# Altium PCB 175-00024_rev3, Backplane, Instrument Crate.PcbDoc (part 2 of 4)
Units mil, origin at the board's own origin, x right, y up, seen from the top; angles counter-clockwise.
Board outline 8400 x 10183.07 mil, 8 copper layers (Top Layer (*.GTL), Mid-Layer 1 (*.G1), +3.3V (*.GP1), +24V (*.GP2), RTN (*.GP3), +12V (*.GP4), Signal GND (*.GP5), Bottom Layer (*.GBL)); 240 components, 169 nets, 1580 pads, 490 vias.
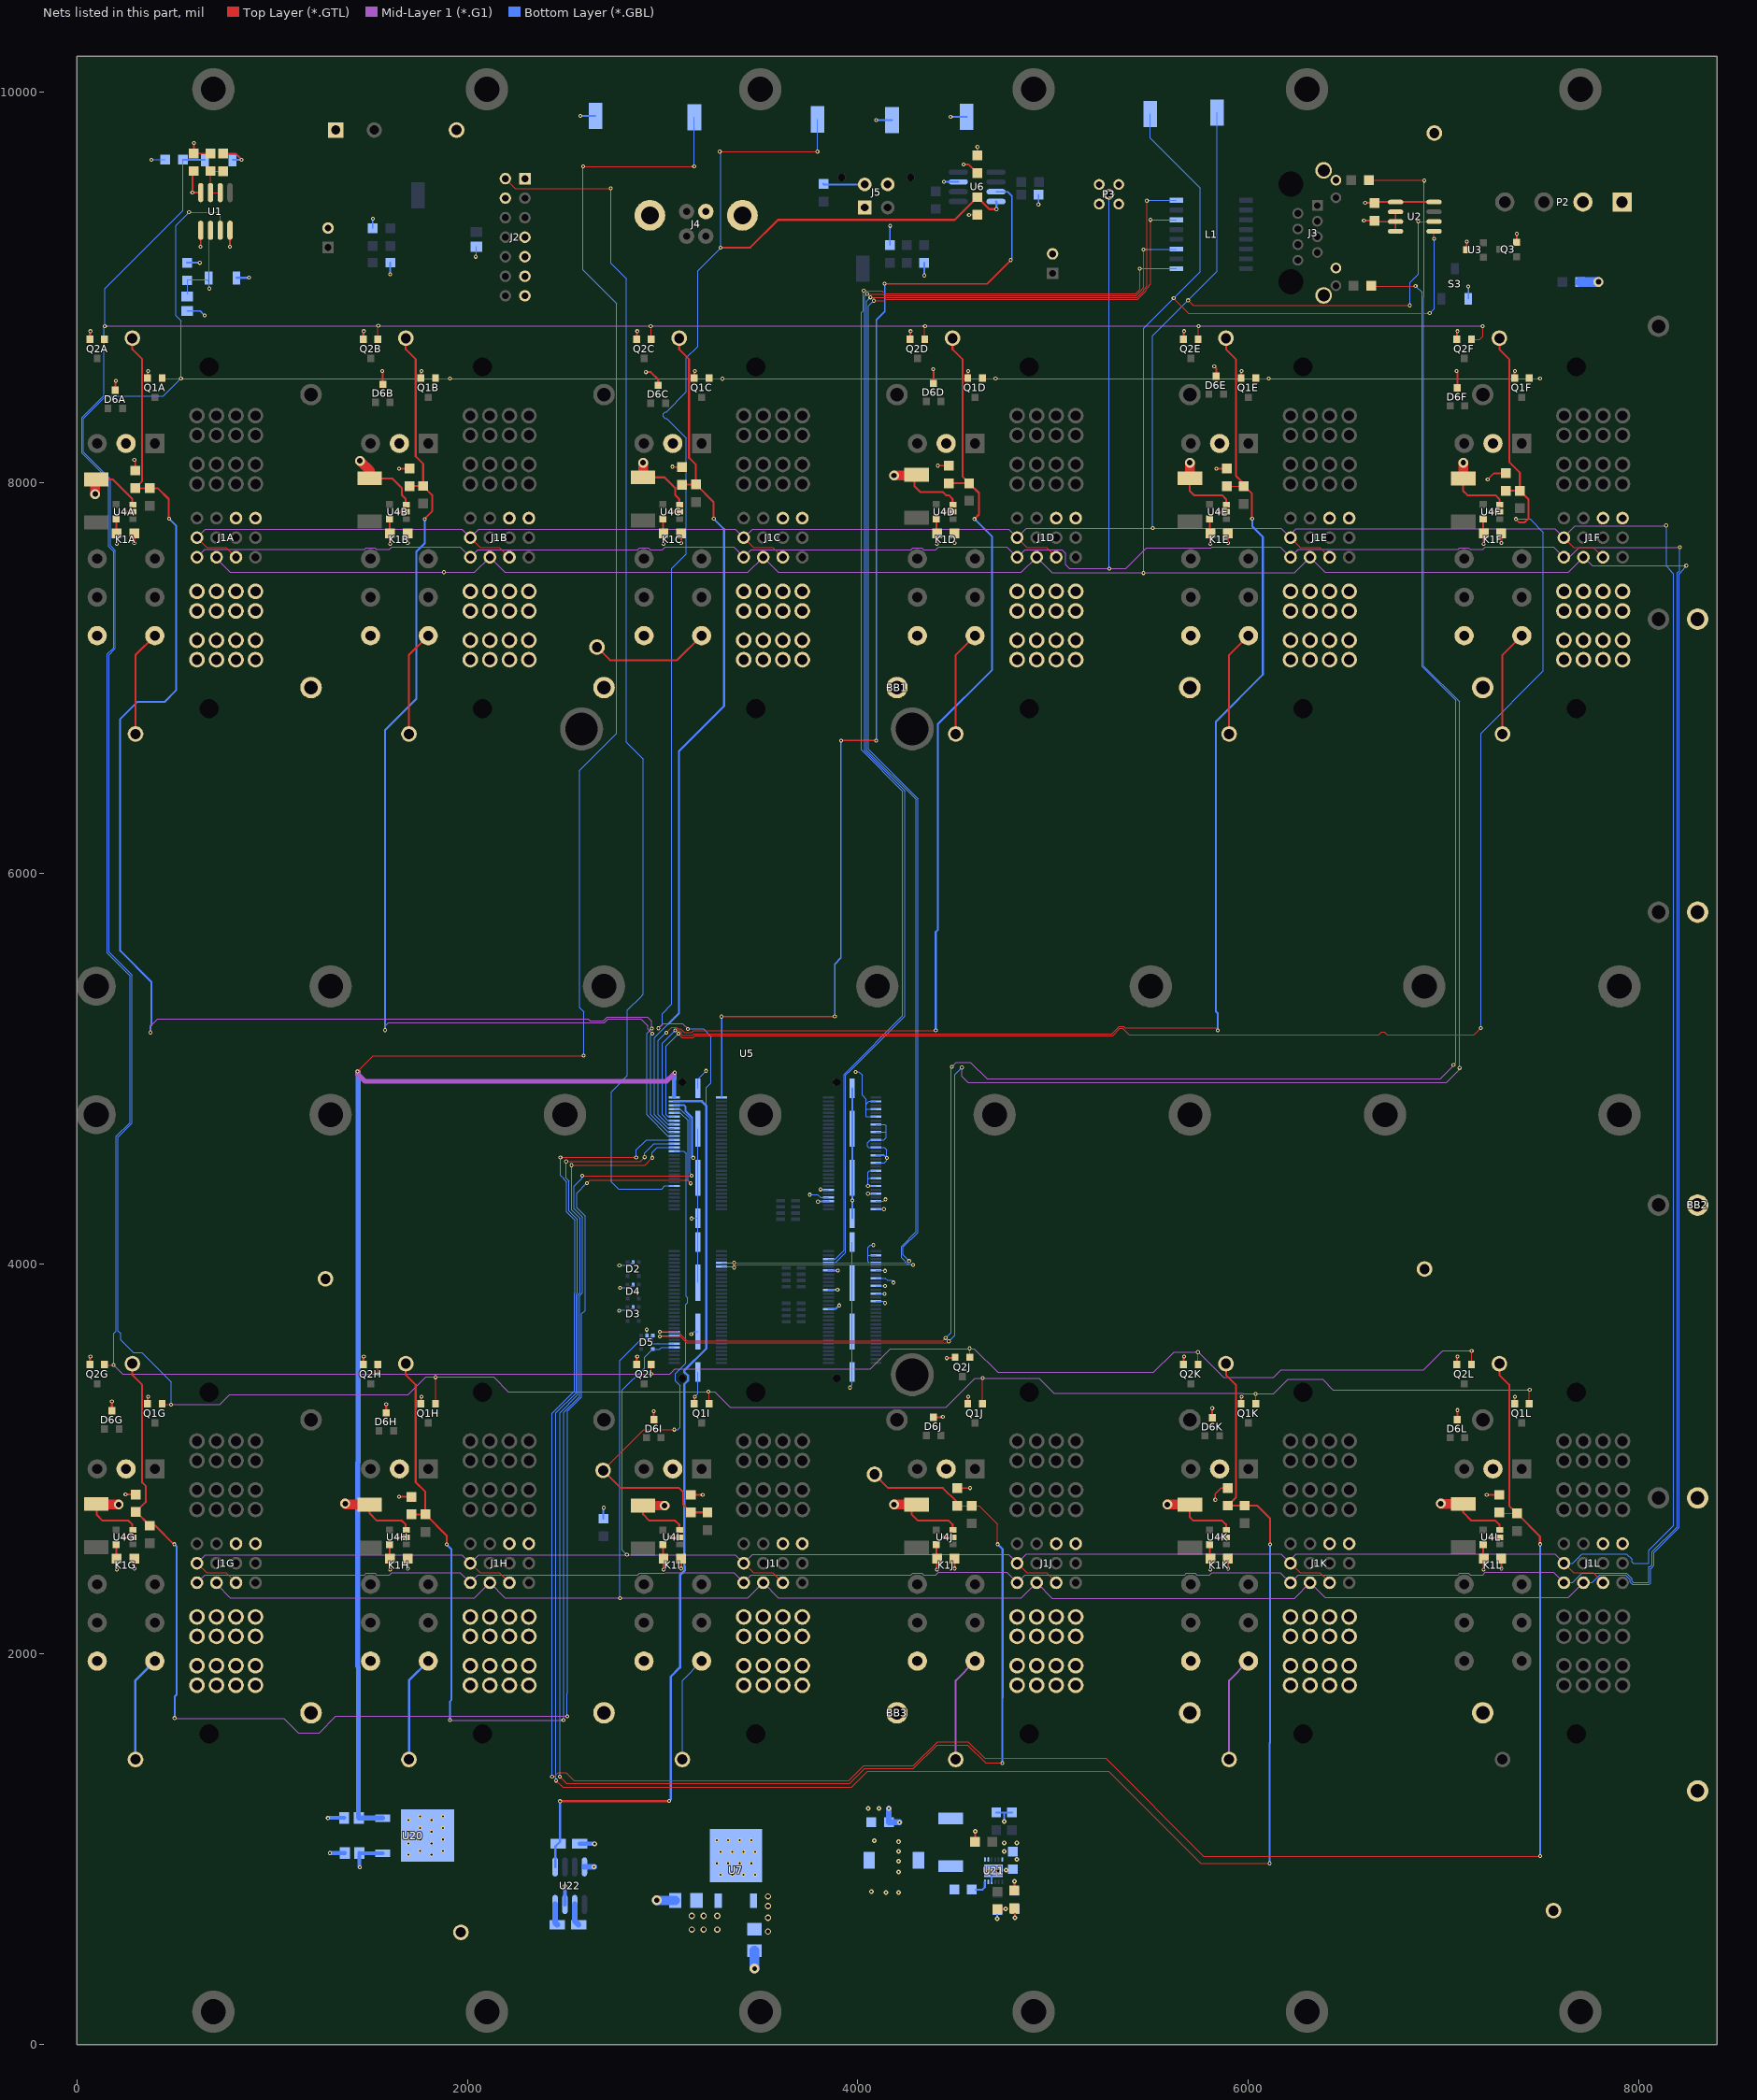
[diagram p8: the nets of this part, all layers, seen from the top]

## Via types
v1: diameter 20, hole 10, Top Layer (*.GTL) to Bottom Layer (*.GBL), 422 vias
v2: diameter 24, hole 10, Top Layer (*.GTL) to Bottom Layer (*.GBL), 28 vias
v3: diameter 50, hole 28, Top Layer (*.GTL) to Bottom Layer (*.GBL), 26 vias
v4: diameter 32, hole 20, Top Layer (*.GTL) to Bottom Layer (*.GBL), 10 vias
v5: diameter 25.98, hole 12.99, Top Layer (*.GTL) to Bottom Layer (*.GBL), tented top, 2 vias
v6: diameter 50, hole 25, Top Layer (*.GTL) to Bottom Layer (*.GBL), 2 vias

## Nets (pads, with @x,y where several pads share a name; then routed paths per layer and width w, separated by ;. In a path a pad name is that pad's centre, name@x,y a point inside that pad or via, vN(x,y) a via of type N, cw(c..) or ccw(c..) an arc to the next point about the centre after c; other vN are vias at no path point)
+3.3V: C6.2 C7.2 C13.2 J1A.11 J1B.11 J1C.11 J1D.11 J1E.11 J1F.11 J1G.11 J1H.11 J1I.11 J1J.11 J1K.11 J1L.11 L2.2 Q3.2 R2.2 R5.2 R12.1 R13.2 R32.2 S2.1 TP27.1 U1.4 U1.8 U2.1 U2.8 U5.B121 U21.5 | length 1750.6
  Top Layer (*.GTL) w10: C6.2@600,9595 592,9587 v1(592,9485) 592.54,9484.46 U1.8@635,9484.46 ; R12.1@750,9684 813.08,9684 v1(844,9653.08) ; v1(785,9207) U1.4@785,9291.54 ; v1(6598,9432) 6647,9432 6651,9436 U2.1@6753.57,9436 U2.8@6950.43,9436 ; Q3.2@7374,9230 v1(7374,9273)
  Bottom Layer (*.GBL) w5: v1(2043,9156.08) 2046,9159.08 R5.2@2046,9207.68
  Bottom Layer (*.GBL) w10: R2.2@565,9125 v1(630,9125) ; S2.1@798,9652 842.92,9652 v1(844,9653.08) ; v1(2579,9877.08) TP27.1@2656,9877.08 ; R13.2@2697,2694 2697,2749 v1(2698,2750) ; U5.B121@3970.93,4232.52 v1@3970.93,4324.01 ; U5.B121@3970.93,4897.48 U5.B121@3970.93,4690 U5.B121@3970.93,4440 3970.93,4324.15 v1(3971,4324.08) ; v2(4713.8,646.34) R32.2@4713.8,689.34
  other v2: 4143.8,779.34 4208.8,779.34 4068.8,784.34 4208.8,884.34 4208.8,939.34 4208.8,989.34 4208.8,1039.34 4083.8,1044.34 4053.8,1209.34 4108.8,1209.34
+5V: C12.1 TP17.1 U5.A1 U20.3 | length 12457.4
  Top Layer (*.GTL) w5: v1(1438,4984.08) 1519,5065.08 v1(2596,5065.08) ; v1(2593,9618.08) v1(3162,9618.08)
  Mid-Layer 1 (*.G1) w25: v1(1438,4984.08) 1438,4971.08 1476,4933.08 3020,4933.08 v1@3059,4972.08
  Bottom Layer (*.GBL) w5: v1(2593,9618.08) 2593,9089.08 2765,8917.08 2765,6715.08 2575,6525.08 2575,5311.08 2596,5290.08 v1(2596,5065.08) ; v1(3162,9618.08) 3162,9869.08 TP17.1@3163,9870.08
  Bottom Layer (*.GBL) w20: U5.A1@3059.12,4853.25 3059.12,4945.48
  Bottom Layer (*.GBL) w25: v1@1441,4984.08 1441,2981.64 1439,2979.64 1439,1937.35 1442.6,1933.75 1442.6,1163.8 C12.1@1444.4,1162 1445.64,1160.76 U20.3@1566.74,1160.76 ; v1@3059,4972.08 3059,4945.6 3059.12,4945.48
  other v1: 3062,4978.08
+12V: C2A.2 C2B.2 C2C.2 C2D.2 C2E.2 C2F.2 C2G.2 C2H.2 C2I.2 C2J.2 C2K.2 C2L.2 C8.1 C10.1 C19.2 R8.2 R10.2 TP29.1 U4A.5 U4B.5 U4C.5 U4D.5 U4E.5 U4F.5 U4G.5 U4H.5 U4I.5 U4J.5 U4K.5 U4L.5 U5.A5 U6.7 U7.3 U20.1 U22.8 | length 2503
  Top Layer (*.GTL) w10: U4G.5@201.99,2561.82 201.99,2491.82 C2G.2@204.99,2488.82 v1(204.99,2433.82) ; U4A.5@202,7813 202,7743 C2A.2@205,7740 v1(205,7685) ; U4H.5@1601.99,2561.82 1601.99,2491.82 C2H.2@1604.99,2488.82 v1(1604.99,2433.82) ; U4B.5@1602,7813 1602,7743 C2B.2@1605,7740 v1(1605,7685) ; U4I.5@3001.99,2561.82 3001.99,2491.82 C2I.2@3004.99,2488.82 v1(3004.99,2433.82) ; U4C.5@3002,7813 3002,7743 C2C.2@3005,7740 v1(3005,7685) ; U4J.5@4401.99,2561.82 4401.99,2491.82 C2J.2@4404.99,2488.82 v1(4404.99,2433.82) ; U4D.5@4402,7813 4402,7743 C2D.2@4405,7740 v1(4405,7685) ; v1(4541,9629) 4567,9629 C8.1@4611,9585 ; U4K.5@5801.99,2561.82 5801.99,2491.82 C2K.2@5804.99,2488.82 v1(5804.99,2433.82) ; U4E.5@5802,7813 5802,7743 C2E.2@5805,7740 v1(5805,7685) ; U4L.5@7201.99,2561.82 7201.99,2491.82 C2L.2@7204.99,2488.82 v1(7204.99,2433.82) ; U4F.5@7202,7813 7202,7743 C2F.2@7205,7740 v1(7205,7685)
  Bottom Layer (*.GBL) w10: v1(1605,9066) 1606,9067 R10.2@1606,9126 ; U5.A5@3059.12,4811.06 3111.02,4811.06 3118,4804.08 3118,4780.64 3151.5,4747.14 3151.5,4547.58 v1(3157,4542.08) ; v1(4093,9855.08) TP29.1@4175,9855.08 ; v1(4340,9060.08) R8.2@4340,9125.08 ; v1(4441,9540) 4442,9539 U6.7@4514.54,9539
  Bottom Layer (*.GBL) w20: v1(1449,909) 1447.4,910.6 C10.1@1447.4,982 1448.17,981.24 U20.1@1566.74,981.24
  Bottom Layer (*.GBL) w30: U22.8@2600,911.06 2648.46,911.06 v2(2649,911.6)
  other v4: 3150,590 3210,590 3280,590 3150,660 3210,660 3280,660
+24V: BB1.1 BB2.1 BB3.1 C15.2 C18.2 C22.1 D6A.3 D6B.3 D6C.3 D6D.3 D6E.3 D6F.3 D6G.3 D6H.3 D6I.3 D6J.3 D6K.3 D6L.3 J5.1 K1A.3 K1B.3 K1C.3 K1D.3 K1E.3 K1F.3 K1G.3 K1H.3 K1I.3 K1J.3 K1K.3 K1L.3 P2.1 P2.2 R4A.1 R4B.1 R4C.1 R4D.1 R4E.1 R4F.1 R4G.1 R4H.1 R4I.1 R4J.1 R4K.1 R4L.1 R29.1 TP9.1 U4A.3 U4B.3 U4C.3 U4D.3 U4E.3 U4F.3 U4G.3 U4H.3 U4I.3 U4J.3 U4K.3 U4L.3 U5.B55 U5.B71 U5.B81 U5.B91 U7.1 U21.12 | length 5773.2
  Top Layer (*.GTL) w10: R4G.1@99.99,2769.06 103.04,2766 103.04,2712.96 132.18,2683.82 264.99,2683.82 284.99,2663.82 284.99,2638.82 U4G.3@287.99,2635.82 ; R4A.1@100,8016.24 183.76,8016.24 285,7915 285,7890 U4A.3@288,7887 ; D6G.3@180,3246.26 v1(180,3295) ; D6A.3@197.4,8472.52 197.4,8517.4 v1(200,8520) ; R4H.1@1500,2766.24 1500,2721 1537.18,2683.82 1664.99,2683.82 1684.99,2663.82 1684.99,2638.82 U4H.3@1687.99,2635.82 ; R4B.1@1500,8021.24 1614.76,8021.24 1665,7971 1665,7935 1685,7915 1685,7890 U4B.3@1688,7887 ; v1(1565,8570) 1567.4,8567.6 D6B.3@1567.4,8502.52 ; D6H.3@1585,3236.26 v1(1585,3280) ; R4I.1@2900,2761.47 2900,2716 2932.18,2683.82 3064.99,2683.82 3084.99,2663.82 3084.99,2638.82 U4I.3@3087.99,2635.82 ; R4C.1@2900,8026.24 3009.76,8026.24 3065,7971 3065,7935 3085,7915 3085,7890 U4C.3@3088,7887 ; v1(2915,8565) 2940,8565 2977.4,8527.6 D6C.3@2977.4,8497.52 ; D6I.3@2955,3201.26 v1(2955,3245) ; R4J.1@4299.99,2766.24 4299.75,2766 4275,2741.25 4275,2716 4307.18,2683.82 4464.99,2683.82 4484.99,2663.82 4484.99,2638.82 U4J.3@4487.99,2635.82 ; R4D.1@4300,8040.24 4295.76,8036 4290,8030.24 4290,7981 4320,7951 4435,7951 4451,7935 4465,7935 4485,7915 4485,7890 U4D.3@4488,7887 ; v1(4385,8580) 4387.4,8577.6 D6D.3@4387.4,8507.52 ; D6J.3@4387.6,3212.52 4432.52,3212.52 v1(4435,3215) ; R29.1@4598.8,1039.34 4601.8,1042.34 v2(4601.8,1092.34) ; R4K.1@5700,2766.24 5700,2701 5717.18,2683.82 5864.99,2683.82 5884.99,2663.82 5884.99,2638.82 U4K.3@5887.99,2635.82 ; R4E.1@5700,8021.24 5700,7956 5721,7935 5865,7935 5885,7915 5885,7890 U4E.3@5888,7887 ; D6K.3@5815,3211.26 v1(5815,3260) ; v1(5825,8595) 5835,8585 D6E.3@5835,8545 ; v1(7065,8570) 7070,8565 D6F.3@7070,8485 ; D6L.3@7070,3201.26 v1(7070,3250) ; R4L.1@7099.99,2769.06 7099.99,2726.01 7142.18,2683.82 7264.99,2683.82 7284.99,2663.82 7284.99,2638.82 U4L.3@7287.99,2635.82 ; R4F.1@7100,8020.24 7100,7956 7121,7935 7265,7935 7285,7915 7285,7890 U4F.3@7288,7887
  Top Layer (*.GTL) w50: v3(95,7941) 95,8011.24 R4A.1@100,8016.24 ; R4G.1@103.04,2766 v3(215,2766) ; v3(1375,2771) 1379.76,2766.24 R4H.1@1500,2766.24 ; v3(1450,8111) 1500,8061 R4B.1@1500,8021.24 ; R4I.1@2900,2761.47 2900.47,2761 v3(3010,2761) ; R4C.1@2900,8026.24 v3(2900,8101) ; v3(4185,2766) R4J.1@4299.75,2766 ; v3(4185,8036) R4D.1@4295.76,8036 ; v3(5585,2766) 5699.76,2766 R4K.1@5700,2766.24 ; R4E.1@5700,8021.24 v3(5700,8101) ; v3(6985,2771) 6986.94,2769.06 R4L.1@7099.99,2769.06 ; R4F.1@7100,8020.24 v3(7100,8101)
  Bottom Layer (*.GBL) w10: v1(3795.89,4317.25) 3797.57,4318.94 U5.B55@3849.28,4318.94 ; U5.B91@3849.28,3767.76 3885.76,3767.76 v1(3904,3786) ; U5.B81@3849.28,3866.18 3893.9,3866.18 v1@3894,3866.08 ; U5.B71@3849.28,3964.61 3897.53,3964.61 v1(3898,3965.08) ; v1(4475,9872.08) TP9.1@4557,9872.08
  other v1: 3896,3866
  other v2: 4813.8,949.34 4748.8,989.34 4748.8,1034.34 4813.8,1034.34
  other v4: 3540,580 3540,650 3540,710 3540,760
-12V: C9.1 C16.2 TP28.1 U5.A3 U6.4 U22.5 | length 12395.7
  Top Layer (*.GTL) w5: v1(3293,9694.08) v1(3793,9694.08)
  Top Layer (*.GTL) w10: v1(3297,9203) 3449,9203 3591,9345 4496,9345 C9.1@4612,9461 4673,9400 v1(4710,9400)
  Top Layer (*.GTL) w12: v1(2475,1247.08) v1@3036,1247.08
  Mid-Layer 1 (*.G1) w5: v1(2978,5205.08) 3003,5230.08 3102,5230.08 v1(3130,5202.08)
  Bottom Layer (*.GBL) w5: v1(2978,5205.08) 2998,5225.08 2998,5280.08 3047,5329.08 3047,7560.08 3122,7635.08 3122,8226.74 3020.24,8328.5 3013.17,8328.5 3003.5,8338.17 3003.5,8351.83 3013.17,8361.5 3020.24,8361.5 3122,8463.26 3122,8639.08 3180,8697.08 3180,9083.08 3299,9202.08 3299,9688.08 v1(3293,9694.08) ; v1(3130,5202.08) 3209.08,5202.08 3248,5163.16 3248,4925.08 3225,4902.08 3225,4807.08 ; v1(3793,9694.08) 3794,9695.08 TP28.1@3794,9859.08
  Bottom Layer (*.GBL) w10: U6.4@4707.46,9439 4710,9436.46 v1(4710,9400)
  Bottom Layer (*.GBL) w12: U22.5@2450,911.06 2450,1014.6 C16.2@2465,1029.6 2475,1039.6 v1(2475,1247.08) ; v1(3033,1249.08) 3041,1257.08 3041,1884.08 3089,1932.08 3089,2404.55 3114.99,2430.53 3114.99,2447.1 3111,2451.09 3111,2923.73 3111.56,2924.29 3111.56,2973.35 3111,2973.91 3111,3381.82 3130.54,3401.36 3130.54,3426.28 3111,3445.82 3111,3452.08 3225,3566.08 3225,4807.08 3201.33,4830.75 U5.A3@3059.12,4830.75
EMU: J2.2 U5.A47 | length 6127.2
  Top Layer (*.GTL) w5: J2.2@2195,9556.08 2246,9505.08 2733,9505.08 v1(2734,9506.08)
  Bottom Layer (*.GBL) w5: v1@2735,9506.08 2735,9121.5 2814,9042.5 2814,6669.99 2890.14,6593.85 2892.77,6591.22 2895.41,6588.58 2898.04,6585.95 2900.68,6583.31 2900.68,5379.49 2898.04,5376.85 2895.41,5374.22 2892.77,5371.58 2890.14,5368.94 2820,5298.81 2820,4962.81 2738,4880.81 2738,4418.35 2774.7,4381.65 2995.97,4381.65 3012,4397.68 U5.A47@3059.12,4397.68
ETHERLED_ACT: R7.1 U5.A103 | length 9913.1
  Top Layer (*.GTL) w5: v1(2986,3651.8) 3079,3651.8 3126.73,3604.08 4434,3604.08 v1(4449,3619.08) ; R7.1@6631,9006.08 v1(6856,9006.08)
  Mid-Layer 1 (*.G1) w5: v1(4481,5007.08) 4505,5031.08 4577,5031.08 4661.2,4946.88 6983,4946.88 7050,5013.88 v1(7050,5018.08)
  Bottom Layer (*.GBL) w5: v1(2986,3651.8) 2988.16,3649.65 U5.A103@3059.12,3649.65 ; v1(4449,3619.08) 4477,3647.08 4477,5003.08 v1(4481,5007.08) ; v1(6856,9006.08) 6889,8973.08 6889,7056.08 7061.2,6883.88 7061.2,5030.28 v1@7049,5018.08
ETHERLED_FD: R6.1 U5.A105 | length 10547.7
  Top Layer (*.GTL) w5: v1(2986,3627.8) 3090.28,3627.8 3123,3595.08 4458.94,3595.08 v1(4465.97,3602.11) ; R6.1@6616,9548.08 6898,9548.08 v1(6900,9546.08)
  Mid-Layer 1 (*.G1) w5: v1(4533,5004.08) 4533,4959.08 4565,4927.08 7014,4927.08 7081,4994.08 v1(7081,5002.08)
  Bottom Layer (*.GBL) w5: v1(2986,3627.8) 2988.16,3629.96 U5.A105@3059.12,3629.96 ; v1(4465.97,3602.11) 4496.8,3632.94 4496.8,4967.88 v1(4533,5004.08) ; v1(6900,9546.08) 6900,8952.08 6898,8950.08 6898,7059.81 7081,6876.81 v1(7081,5002.08)
ETHERRX+: L1.11 U5.B67 | length 7037.7
  Top Layer (*.GTL) w5: v1(4047.09,8964.99) 4128.54,8964.99 4136.51,8957.02 5425.73,8957.02 5454,8985.29 5454,8989.02 5463,8998.02 v1(5463,9193.08)
  Bottom Layer (*.GBL) w5: U5.B67@3849.28,4003.98 3885,4003.98 3938,4056.98 3938,4965.33 3952.17,4979.5 3953.42,4979.5 4241,5267.08 4241,6421.08 4036,6626.08 4036,8953.9 v1(4047.09,8964.99) ; v1(5463,9193.08) 5465,9195.08 L1.11@5632,9195.08
ETHERRX-: L1.9 U5.B65 | length 6955.1
  Top Layer (*.GTL) w5: v1(4030.12,8981.96) 4124.3,8981.96 4140.24,8966.02 5422,8966.02 5445,8989.02 v1@5445,9095.08
  Bottom Layer (*.GBL) w5: U5.B65@3849.28,4023.66 3885,4023.66 3929,4067.66 3929,4969.06 3948.44,4988.5 3949.69,4988.5 4230,5268.81 4230,6419.35 4019,6630.35 4019,8871.08 4027,8879.08 4027,8978.84 v1(4030.12,8981.96) ; v1(5444,9094.08) 5445,9095.08 L1.9@5632,9095.08
ETHERTX+: L1.16 U5.A70 | length 8161.2
  Top Layer (*.GTL) w5: v1(3366,3979.98) 3381,3994.98 4280.5,3994.98 v1(4282,3993.48) ; v1(4064.06,8948.02) 5429.46,8948.02 5463,8981.56 5463,8985.29 5472,8994.29 5472,8998.02 5481,9007.02 v1@5481,9445.08
  Bottom Layer (*.GBL) w5: U5.A70@3302.43,3984.29 3361.69,3984.29 v1(3366,3979.98) ; v1(4064.06,8948.02) 4045,8928.96 4045,6629.81 4298,6376.81 4298,4163.53 4223,4088.53 4223,4029.15 4255.37,3996.78 4278.7,3996.78 v1(4282,3993.48) ; v1(5480,9443.08) 5482,9445.08 L1.16@5632,9445.08
ETHERTX-: L1.14 U5.A68 | length 7963.7
  Top Layer (*.GTL) w5: v1(3366,4003.98) 4252.9,4003.98 v1(4262.2,4013.28) ; v1(4081.03,8931.05) 4137.03,8931.05 4145,8939.02 5433.18,8939.02 5472,8977.84 5472,8981.56 5481,8990.56 5481,8994.29 5490,9003.29 5490,9007.02 5499,9016.02 v1@5499,9345.08
  Bottom Layer (*.GBL) w5: U5.A68@3302.43,4003.98 v1(3366,4003.98) ; v1(4081.03,8931.05) 4054,8904.02 4054,6633.53 4307,6380.53 4307,4159.81 4232,4084.81 4232,4043.48 v1(4262.2,4013.28) ; v1(5498,9345.08) L1.14@5632,9345.08
"FAN SPEED": U5.A2 U6.3 | length 6076.1
  Top Layer (*.GTL) w6: v1(3301,5265) 3881,5265 v1(3882,5266) ; v1(3914,6678) v1(4094,6678) ; v1(4137,9018) 4662,9018 v1(4783,9139)
  Bottom Layer (*.GBL) w6: v1(3301,5265) 3302.43,5263.57 U5.A2@3302.43,4850.43 ; v1(3882,5266) 3882,5534 3914,5566 v1(3914,6678) ; v1(4094,6678) 4094,8833 4137,8876 v1(4137,9018) ; U6.3@4707.46,9489 4767,9489 4788,9468 4788,9144 v1(4783,9139)
"FAN TACH": J5.3 R17.2 | length 212.1
  Bottom Layer (*.GBL) w10: R17.2@3824,9529 3826.89,9526.11 J5.3@4034.89,9526.11
GND: C1.1 C2A.1 C2B.1 C2C.1 C2D.1 C2E.1 C2F.1 C2G.1 C2H.1 C2I.1 C2J.1 C2K.1 C2L.1 C3.1 C4.1 C5.2 C6.1 C7.1 C8.2 C9.2 C10.2 C12.2 C13.1 C14.1 C15.1 C16.1 C18.1 C19.1 C21A.2 C21B.2 C21C.2 C21D.2 C21E.2 C21F.2 C21G.2 C21H.2 C21I.2 C21J.2 C21K.2 C21L.2 D2.2 D3.2 D4.2 D5.2 J1A.12 J1B.12 J1C.12 J1D.12 J1E.12 J1F.12 J1G.12 J1H.12 J1I.12 J1J.12 J1K.12 J1L.12 J2.1 J2.4 J2.7 J2.9 J2.11 J2.13 J3.9 J3.11 J3.13 J3.14 J4.4 J4.5 J4.6 J5.4 P1.2 P3.2 P3.3 P3.4 P3.5 P4.2 Q1A.2 Q1B.2 Q1C.2 Q1D.2 Q1E.2 Q1F.2 Q1G.2 Q1H.2 Q1I.2 Q1J.2 Q1K.2 Q1L.2 Q2A.2 Q2B.2 Q2C.2 Q2D.2 Q2E.2 Q2F.2 Q2G.2 Q2H.2 Q2I.2 Q2J.2 Q2K.2 Q2L.2 R1.2 R3.1 R15.1 R30.1 R31.1 R34.1 S1.1 S3.1 TP1.1 TP2.1 TP3.1 TP6.1 TP7.1 TP8.1 U1.1 U2.2 U2.3 U2.4 U3.3 U4A.2 U4B.2 U4C.2 U4D.2 U4E.2 U4F.2 U4G.2 U4H.2 U4I.2 U4J.2 U4K.2 U4L.2 U5.A121 U5.A122 U5.B4 U5.B8 U5.B12 U5.B16 U5.B20 U5.B24 U5.B28 U5.B32 U5.B36 U5.B40 U5.B44 U5.B48 U5.B49 U5.B52 U5.B53 U5.B56 U5.B60 U5.B64 U5.B68 U5.B72 U5.B76 U5.B80 U5.B84 U5.B88 U5.B122 U7.2 U20.2 U21.4 U21.13 U22.3 | length 9159
  Top Layer (*.GTL) w8: v1(250,2818) C21G.2@302,2818 ; v1(295,8116) 300,8111 C21A.2@300,8061 ; v1(600,9739) C6.1@600,9685 C5.2@685,9685 ; v1(634,9207) 635,9208 U1.1@635,9291.54 ; v1(1650,2806) C21H.2@1715,2806 ; v1(1650,8071) C21B.2@1705,8071 ; v1(3050,8081) 3052,8079 C21C.2@3100,8079 ; C21I.2@3145,2816 v1(3205,2816) ; v1(4410,8086) C21D.2@4465,8086 ; C21J.2@4509,2850 4574,2850 v1(4575,2851) ; v1(4569,9370) 4570,9371 C9.2@4612,9371 ; C8.2@4611,9675 4611,9717 v1(4612,9718) ; v1(5830,2791) 5830,2821 5860,2851 C21K.2@5895,2851 ; v1(5835,8071) C21E.2@5890,8071 ; v1(6591,9342) 6592,9341 C7.1@6646,9341 6651,9336 U2.3@6753.57,9336 ; U2.4@6753.57,9286 U2.3@6753.57,9336 ; U2.2@6753.57,9386 U2.3@6753.57,9336 ; U3.3@7118,9191 7118,9233 v1(7119,9234) ; v1(7220,2816) C21L.2@7285,2816 ; v1(7225,8016) 7256,8047 C21F.2@7318,8047
  Top Layer (*.GTL) w10: Q2G.2@67.59,3480.08 Q2G.2@67.59,3483.03 v1@67.59,3521.42 ; Q2A.2@67.6,8731.26 Q2A.2@67.6,8734.21 v1@67.6,8772.6 ; v1(239.99,2598.82) U4G.2@287.99,2598.82 ; v1(240,7850) U4A.2@288,7850 ; v1(294.99,2438.82) C2G.1@294.99,2488.82 ; v1(295,7690) C2A.1@295,7740 ; Q1G.2@362.59,3280.08 Q1G.2@362.59,3283.03 362.59,3316.42 v1(364.99,3318.82) ; Q1A.2@362.6,8531.26 Q1A.2@362.6,8534.21 362.6,8567.6 v1(365,8570) ; Q2H.2@1467.59,3480.08 Q2H.2@1467.59,3483.03 v1@1467.59,3521.42 ; Q2B.2@1467.6,8731.26 Q2B.2@1467.6,8734.21 v1@1467.6,8772.6 ; v1(1639.99,2598.82) U4H.2@1687.99,2598.82 ; v1(1640,7850) U4B.2@1688,7850 ; v1(1694.99,2438.82) C2H.1@1694.99,2488.82 ; v1(1695,7690) C2B.1@1695,7740 ; Q1H.2@1762.59,3280.08 Q1H.2@1762.59,3283.03 1762.59,3316.42 v1(1764.99,3318.82) ; Q1B.2@1762.6,8531.26 Q1B.2@1762.6,8534.21 1762.6,8567.6 v1(1765,8570) ; Q2I.2@2867.59,3480.08 Q2I.2@2867.59,3483.03 v1@2867.59,3521.42 ; Q2C.2@2867.6,8731.26 Q2C.2@2867.6,8734.21 v1@2867.6,8772.6 ; v1(3039.99,2598.82) U4I.2@3087.99,2598.82 ; v1(3040,7850) U4C.2@3088,7850 ; v1(3094.99,2438.82) C2I.1@3094.99,2488.82 ; v1(3095,7690) C2C.1@3095,7740 ; Q1I.2@3162.59,3280.08 Q1I.2@3162.59,3283.03 3162.59,3316.42 v1(3164.99,3318.82) ; Q1C.2@3162.6,8531.26 Q1C.2@3162.6,8534.21 3162.6,8567.6 v1(3165,8570) ; Q2D.2@4267.6,8731.26 Q2D.2@4267.6,8734.21 v1@4267.6,8772.6 ; v1(4439.99,2598.82) U4J.2@4487.99,2598.82 ; v1(4440,7850) U4D.2@4488,7850 ; v1(4454.5,3516.14) 4455.76,3517.4 Q2J.2@4498.1,3517.4 ; v1(4494.99,2438.82) C2J.1@4494.99,2488.82 ; v1(4495,7690) C2D.1@4495,7740 ; Q1J.2@4562.59,3280.08 Q1J.2@4562.59,3283.03 4562.59,3316.42 v1(4564.99,3318.82) ; Q1D.2@4562.6,8531.26 Q1D.2@4562.6,8534.21 4562.6,8567.6 v1(4565,8570) ; R34.1@4713.8,694.34 4755.8,694.34 v2(4756.8,695.34) ; C14.1@4801.8,789.34 4801.8,835.34 v2(4802.8,836.34) ; Q2K.2@5667.59,3480.08 Q2K.2@5667.59,3483.03 v1@5667.59,3521.42 ; Q2E.2@5667.6,8731.26 Q2E.2@5667.6,8734.21 v1@5667.6,8772.6 ; v1(5839.99,2598.82) U4K.2@5887.99,2598.82 ; v1(5840,7850) U4E.2@5888,7850 ; v1(5894.99,2438.82) C2K.1@5894.99,2488.82 ; v1(5895,7690) C2E.1@5895,7740 ; Q1K.2@5962.59,3280.08 Q1K.2@5962.59,3283.03 5962.59,3316.42 v1(5964.99,3318.82) ; Q1E.2@5962.6,8531.26 Q1E.2@5962.6,8534.21 5962.6,8567.6 v1(5965,8570) ; Q2L.2@7067.59,3480.08 Q2L.2@7067.59,3483.03 v1@7067.59,3521.42 ; Q2F.2@7067.6,8731.26 Q2F.2@7067.6,8734.21 v1@7067.6,8772.6 ; v1(7239.99,2598.82) U4L.2@7287.99,2598.82 ; v1(7240,7850) U4F.2@7288,7850 ; v1(7294.99,2438.82) C2L.1@7294.99,2488.82 ; v1(7295,7690) C2F.1@7295,7740 ; Q1L.2@7362.59,3280.08 Q1L.2@7362.59,3283.03 7362.59,3316.42 v1(7364.99,3318.82) ; Q1F.2@7362.6,8531.26 Q1F.2@7362.6,8534.21 7362.6,8567.6 v1(7365,8570)
  Bottom Layer (*.GBL) w5: v1(383,9653.08) R3.1@453,9653.08 ; v1(2778,3758.6) 2780.66,3761.26 2832.53,3761.26 2848.88,3777.6 D3.2@2849.53,3777.6 D3.2@2849.53,3772.13 ; v1(2779,3990.6) 2779.66,3991.26 2832.53,3991.26 2848.88,4007.6 D2.2@2849.53,4007.6 D2.2@2849.53,4002.13 ; v1(2783,3875.6) 2783.66,3876.26 2832.53,3876.26 2848.88,3892.6 D4.2@2849.53,3892.6 D4.2@2849.53,3887.13 ; D5.2@2919.53,3632.6 v1(2919.53,3662.13) ; v1(3147,3639.08) 3160.52,3652.6 U5.A122@3180.78,3652.6 ; v1(3148,4231.08) 3149.44,4232.52 U5.A121@3180.78,4232.52 ; v1(3164.99,3318.82) 3180.78,3334.61 U5.A122@3180.78,3445.12 ; U5.A122@3180.78,3902.6 U5.A122@3180.78,4110.08 U5.A121@3180.78,4232.52 ; U5.A121@3180.78,4690 3180.5,4689.72 3180.5,4440.28 U5.A121@3180.78,4440 U5.A121@3180.78,4232.52 ; U5.A121@3180.78,4897.48 3180.78,4944.85 v1(3223,4987.08) ; v1(3754,4353) 3794.08,4353 3809,4338.08 3809.54,4338.62 U5.B53@3849.28,4338.62 ; v1(3809,4380.08) 3811.09,4377.99 U5.B49@3849.28,4377.99 ; v1(3960,3365.08) 3960,3368.21 3970.93,3379.15 U5.B122@3970.93,3445.12 U5.B122@3970.93,3652.6 U5.B122@3970.93,3902.6 U5.B122@3970.93,4110.08 ; v1(3988,4982.08) 4005,4982.08 4022,4965.08 4022,4862.08 4043,4841.08 4043,4816.08 ; 4043.7,4791.38 U5.B8@4092.59,4791.38 ; 4051.27,4043.35 U5.B64@4092.59,4043.35 ; v1(4052,4358.08) 4050.46,4358.08 4050.23,4358.31 U5.B52@4092.59,4358.31 ; v1(4052,4397.08) v1@4052,4397.68 ; v1(4079,4095.08) 4064,4095.08 4051,4082.08 4051,4010.08 4057.1,4003.98 U5.B68@4092.59,4003.98 ; U5.B88@4092.59,3807.13 4129.95,3807.13 v1(4139,3798.08) ; U5.B84@4092.59,3846.5 4135.58,3846.5 v1(4137,3845.08) ; U5.B80@4092.59,3885.87 4137.79,3885.87 v1@4138,3886.08 ; U5.B76@4092.59,3925.24 4141.51,3925.24 4151.17,3915.58 4170.5,3915.58 v1(4183,3903.08) ; U5.B72@4092.59,3964.61 4136.47,3964.61 v1@4138,3963.08 ; U5.B60@4092.59,4279.57 4132.51,4279.57 v1(4133,4279.08) ; U5.B56@4092.59,4318.94 4130.86,4318.94 v1(4141,4329.08) ; U5.B48@4092.59,4397.68 v1@4052,4397.68 ; U5.B44@4092.59,4437.05 4055.97,4437.05 4052,4433.08 ; U5.B40@4092.59,4476.42 4059.34,4476.42 4052,4469.08 4052,4433.08 ; U5.B36@4092.59,4515.79 4134.71,4515.79 4148,4529.08 v1(4148,4541.08) 4148,4582.08 4135.55,4594.53 U5.B28@4092.59,4594.53 4054.55,4594.53 4049,4600.08 4049,4620.08 4062.82,4633.9 U5.B24@4092.59,4633.9 4133.82,4633.9 4145,4645.08 4145,4673.08 ; U5.B20@4092.59,4673.27 4144.81,4673.27 4145,4673.08 ; U5.B16@4092.59,4712.64 4137.44,4712.64 4145,4705.08 4145,4673.08 ; U5.B12@4092.59,4752.01 4043.07,4752.01 4043,4752.08 4043,4816.08 ; U5.B4@4092.59,4830.75 4057.67,4830.75 4043,4816.08 ; v1@4052,4397.68 4052,4433.08
  Bottom Layer (*.GBL) w8: C1.1@565,8877.6 632.4,8877.6 v1(655,8855) ; P4.2@1287,9303 P4.2@1289,9301 ; C4.1@1516,9301 1516,9350 v1(1517,9351) ; U5.B32@4092.59,4555.16 4133.92,4555.16 v1(4148,4541.08) ; C3.1@4165,9215.08 4165,9302 4166,9303 v1(4166,9314) ; v1(4925,9424) 4926,9425 R15.1@4926,9474 ; v1(7125,9004) 7125.9,9003.1 S3.1@7125.9,8941.23
  Bottom Layer (*.GBL) w10: S1.1@818,9048 880.92,9048 v1(883,9050.08) ; U21.4@4685.65,834.34 4685.65,882.57 U21.13@4694.51,891.43 ; R30.1@4708.8,1189.34 4749.8,1189.34 ; v2(4749.8,1142.34) 4749.8,1189.34 ; R31.1@4788.8,1189.34 4749.8,1189.34
  Bottom Layer (*.GBL) w20: v1(1286,1161) 1287,1162 C12.2@1369.6,1162 ; v1(1297,982) C10.2@1372.6,982 ; U22.3@2500,718.14 v2(2500,812.6) ; C16.1@2575,1029.6 v2(2652,1029.6)
  Bottom Layer (*.GBL) w30: v2(4158.8,1209.34) C13.1@4158.8,1139.34 v2(4213.8,1139.34)
  Bottom Layer (*.GBL) w50: v6(2970,740) 2971,739 C19.1@3064,739 ; C18.1@3470,482 3470,390 v6(3471,390) ; R1.2@7697.48,9027.08 v3(7792.48,9027.08)
  other v1: 69.99,3523.82 1469.99,3523.82 2869.99,3523.82 5669.99,3523.82 7069.99,3523.82 4139,3886 4139,3963 70,8775 1470,8775 2870,8775 4270,8775 5670,8775 7070,8775
  other v2: 4758.8,894.34
  other v5: 4670.89,891.43 4718.13,891.43
GPS_DATA: J1A.1 J1B.1 J1C.1 J1D.1 J1E.1 J1F.1 J1G.1 J1H.1 J1I.1 J1J.1 J1K.1 J1L.1 P3.1 | length 22990.9
  Mid-Layer 1 (*.G1) w5: J1G.1@615.5,2366.14 655.78,2406.42 1474.07,2406.42 1481.64,2413.98 1527.79,2413.98 1535.35,2406.42 1600.92,2406.42 1612.92,2418.42 1963.22,2418.42 J1H.1@2015.5,2366.14 2054.78,2405.42 2873.07,2405.42 2881.64,2413.98 3008.48,2413.98 3012.16,2417.65 3363.99,2417.65 J1I.1@3415.5,2366.14 3454.78,2405.42 4273.07,2405.42 4281.64,2413.98 4327.79,2413.98 4336.35,2405.42 4399.92,2405.42 4413.92,2419.42 4762.22,2419.42 J1J.1@4815.5,2366.14 4854.78,2405.42 5673.07,2405.42 5681.64,2413.98 5727.79,2413.98 5736.35,2405.42 5799.92,2405.42 5812.92,2418.42 6163.22,2418.42 J1K.1@6215.5,2366.14 6255.78,2406.42 7074.07,2406.42 7081.64,2413.98 7127.79,2413.98 7135.35,2406.42 7200.92,2406.42 7213.92,2419.42 7562.22,2419.42 J1L.1@7615.5,2366.14 ; J1A.1@615.51,7617.32 655.79,7657.6 1474.08,7657.6 1481.65,7665.16 1527.8,7665.16 1535.36,7657.6 1600.93,7657.6 1612.93,7669.6 1963.24,7669.6 J1B.1@2015.51,7617.32 2054.79,7656.6 2873.08,7656.6 2881.65,7665.16 2927.8,7665.16 2936.36,7656.6 2999.93,7656.6 3012.17,7668.83 3364,7668.83 J1C.1@3415.51,7617.32 3454.79,7656.6 4273.08,7656.6 4281.65,7665.16 4327.8,7665.16 4336.36,7656.6 4399.93,7656.6 4413.93,7670.6 4762.24,7670.6 J1D.1@4815.51,7617.32 4854.79,7656.6 5045.48,7656.6 5065,7637.08 5065,7578.08 5083,7560.08 5371.99,7560.08 5477.07,7665.16 5808.5,7665.16 5812.93,7669.6 6163.24,7669.6 J1E.1@6215.51,7617.32 6255.79,7657.6 7074.08,7657.6 7081.65,7665.16 7127.8,7665.16 7135.36,7657.6 7200.93,7657.6 7213.93,7670.6 7562.24,7670.6 J1F.1@7615.51,7617.32 7643.24,7617.32 7694,7668.08 v1(8209,7668.08)
  Bottom Layer (*.GBL) w5: P3.1@5286,9476.08 5286,7560.08 v1(5287,7559.08) ; J1L.1@7615.5,2366.14 7660.35,2366.14 7708.35,2414.14 7935.38,2414.14 7963.5,2386.02 7963.5,2373.3 7970.65,2366.14 8050,2366.14 8050,2448.14 8057.46,2448.14 8068,2458.69 8068,2524.62 8196,2652.62 8196,7537.81 8201.27,7543.08 8205,7543.08 8208.5,7546.58 v1@8208.5,7668.08
I2C_SCL: D5.4 J1A.3 J1A.5 J1B.3 J1B.5 J1C.3 J1C.5 J1D.3 J1D.5 J1E.3 J1E.5 J1F.3 J1F.5 J1G.3 J1G.5 J1H.3 J1H.5 J1I.3 J1I.5 J1J.3 J1J.5 J1K.3 J1K.5 J1L.3 J1L.5 TP13.1 U2.6 U5.A111 | length 28886.5
  Top Layer (*.GTL) w5: J1G.5@615.5,2465.98 664.82,2416.65 764.82,2416.65 J1G.3@815.5,2365.98 ; J1A.5@615.51,7717.32 664.83,7668 764.83,7668 J1A.3@815.51,7617.32 ; J1H.5@2015.5,2465.98 2064.82,2416.65 2164.82,2416.65 J1H.3@2215.5,2365.98 ; J1B.5@2015.51,7717.16 2064.83,7667.83 2164.83,7667.83 J1B.3@2215.51,7617.16 ; J1I.5@3415.5,2465.98 3464.82,2416.65 3564.82,2416.65 J1I.3@3615.5,2365.98 ; J1C.5@3415.51,7717.16 3464.83,7667.83 3564.83,7667.83 J1C.3@3615.51,7617.16 ; J1J.5@4815.5,2465.98 4864.82,2416.65 4964.82,2416.65 J1J.3@5015.5,2365.98 ; J1D.5@4815.51,7717.16 4864.83,7667.83 4964.83,7667.83 J1D.3@5015.51,7617.16 ; v1(5691,8933) 5717,8907 v1(6827,8907) ; J1K.5@6215.5,2465.98 6264.82,2416.65 6364.82,2416.65 J1K.3@6415.5,2365.98 ; J1E.5@6215.51,7717.16 6264.83,7667.83 6364.83,7667.83 J1E.3@6415.51,7617.16 ; v1(6870,9337) 6871,9336 U2.6@6950.43,9336 ; J1L.5@7615.5,2465.98 7664.82,2416.65 7764.82,2416.65 J1L.3@7815.5,2365.98 ; J1F.5@7615.51,7717.16 7664.83,7667.83 7764.83,7667.83 J1F.3@7815.51,7617.16
  Mid-Layer 1 (*.G1) w5: J1G.5@615.5,2466.14 658.78,2509.42 1972.22,2509.42 J1H.5@2015.5,2466.14 2058.78,2509.42 3372.22,2509.42 J1I.5@3415.5,2466.14 3459.78,2510.42 4771.22,2510.42 J1J.5@4815.5,2466.14 4862.78,2513.42 6168.22,2513.42 J1K.5@6215.5,2466.14 6215.5,2483.93 6243.99,2512.42 7569.22,2512.42 J1L.5@7615.5,2466.14 ; J1A.5@615.51,7717.32 658.79,7760.6 1972.24,7760.6 J1B.5@2015.51,7717.32 2058.79,7760.6 3372.24,7760.6 J1C.5@3415.51,7717.32 3459.79,7761.6 4771.24,7761.6 J1D.5@4815.51,7717.32 4862.79,7764.6 6168.24,7764.6 J1E.5@6215.51,7717.32 6215.51,7735.11 6244,7763.6 7569.24,7763.6 J1F.5@7615.51,7717.32 7615.51,7719.59 7673,7777.08 8136,7777.08 v1(8139,7780.08)
  Bottom Layer (*.GBL) w5: v1(2817,2510.08) 2794,2533.08 2794,3352.08 2907.4,3465.48 2907.4,3520.08 D5.4@2949.06,3561.73 2984.13,3561.73 2993.31,3570.91 U5.A111@3059.12,3570.91 ; v1(5510,7766.08) 5510,8752.08 5839,9081.08 TP13.1@5839,9894.08 ; v1(6827,8907) 6827,9024 6870,9067 v1(6870,9337) ; J1L.5@7615.5,2466.14 7660.35,2466.14 7708.35,2514.14 7935.38,2514.14 7963.5,2486.02 7963.5,2473.3 7970.65,2466.14 8050,2466.14 8050,2532.08 8178,2660.08 8178,7534.08 8174.27,7534.08 8165.5,7542.85 8165.5,7546.58 8140.5,7571.58 8140.5,7778.58 v1(8139,7780.08)
I2C_SDA: D5.3 J1A.2 J1B.2 J1C.2 J1D.2 J1E.2 J1F.2 J1G.2 J1H.2 J1I.2 J1J.2 J1K.2 J1L.2 TP12.1 U2.5 U5.A109 | length 26814
  Top Layer (*.GTL) w5: v1(5617,8944) 5694,8867 v1(6928,8867) ; U2.5@6950.43,9286 6950.43,9248.57 v1(6951,9248)
  Mid-Layer 1 (*.G1) w5: J1G.2@715.5,2366.14 715.5,2358.91 785.99,2288.42 2037.78,2288.42 J1H.2@2115.5,2366.14 2193.22,2288.42 3437.78,2288.42 J1I.2@3515.5,2366.14 3593.22,2288.42 4837.78,2288.42 J1J.2@4915.5,2366.14 4995.22,2286.42 6235.78,2286.42 J1K.2@6315.5,2366.14 6391.99,2289.65 7639.01,2289.65 J1L.2@7715.5,2366.14 ; J1A.2@715.51,7617.32 715.51,7610.09 786,7539.6 2037.79,7539.6 J1B.2@2115.51,7617.32 2193.24,7539.6 3437.79,7539.6 J1C.2@3515.51,7617.32 3593.24,7539.6 4837.79,7539.6 J1D.2@4915.51,7617.32 4995.24,7537.6 6235.79,7537.6 J1E.2@6315.51,7617.32 6392,7540.83 7639.02,7540.83 J1F.2@7715.51,7617.32 7759.76,7573.08 8241,7573.08 v1(8242,7574.08)
  Bottom Layer (*.GBL) w5: v1(2782,2287.08) 2782,3504.08 2894.18,3616.26 2930.09,3616.26 2946.44,3632.6 D5.3@2949.06,3632.6 2949.06,3591.54 ; 2950,3590.59 2976.99,3590.59 ; 2976.99,3591.61 2976.99,3590.59 ; U5.A109@3059.12,3590.59 2976.99,3590.59 ; v1(5463,7536.08) 5463,8790.08 5753,9080.08 5753,9508.08 5497,9764.08 TP12.1@5497,9887.08 ; v1(6928,8867) 6951,8890 v1(6951,9248) ; J1L.2@7715.5,2366.14 7760.35,2366.14 7799.35,2405.14 7931.65,2405.14 7954.5,2382.3 7954.5,2369.57 7966.93,2357.14 8053.73,2357.14 8059,2362.41 8059,2439.14 8061.18,2439.14 8077,2454.96 8077,2520.89 8205,2648.89 8205,7534.08 8208.73,7534.08 8217.5,7542.85 8217.5,7546.58 v1@8242.5,7571.58
  other v1: 1880,7540.6
IMON_SLOT1: C21A.1 R18A.1 TP11A.1 U5.A21 | length 7327.9
  Top Layer (*.GTL) w10: TP11A.1@285,8739 285,8681.64 335.5,8631.14 335.5,8006.5 C21A.1@300,7971 R18A.1@375,7971 415,7971 470.92,7915.08 470.92,7813 v1(473,7815.08)
  Mid-Layer 1 (*.G1) w5: v1(377.95,5183.86) 377.95,5218.03 414,5254.08 2619,5254.08 2629,5244.08 2697.38,5244.08 2716.38,5263.08 2922,5263.08 2945,5240.08 v1(2945,5204.08)
  Bottom Layer (*.GBL) w5: v1(2945,5204.08) 2919.57,5178.65 2919.57,4762.01 3028,4653.58 U5.A21@3059.12,4653.58
  Bottom Layer (*.GBL) w10: v1(377.95,5183.86) 377.95,5218.03 382,5222.08 382,5443.08 223,5602.08 223,6788.88 310.2,6876.08 449.2,6876.08 510,6936.88 510,7778.08 v1(473,7815.08)
IMON_SLOT2: C21B.1 R18B.1 TP11B.1 U5.A19 | length 5791
  Top Layer (*.GTL) w10: TP11B.1@1685,8739 1685,8681.64 1735.5,8631.14 1735.5,8134 1774,8095.5 R18B.1@1774,7982 ; C21B.1@1705,7981 1706,7982 R18B.1@1774,7982 ; v1(1782,7812.08) 1781.08,7813 1820,7851.92 1820,7936 R18B.1@1774,7982
  Mid-Layer 1 (*.G1) w5: v1(1578.74,5195.67) 1578.74,5215.82 1597,5234.08 2701.52,5234.08 2720.52,5253.08 2889,5253.08 2924,5218.08 2924,5201.08 v1(2948,5177.08)
  Bottom Layer (*.GBL) w5: v1(2948,5177.08) 2939.26,5168.34 2939.26,4762.01 3028,4673.27 U5.A19@3059.12,4673.27
  Bottom Layer (*.GBL) w10: v1(1578.74,5195.67) 1579,5195.93 1579,6732.08 1739,6892.08 1739,7646.08 1782,7689.08 v1(1782,7812.08)
IMON_SLOT3: C21C.1 R18C.1 TP11C.1 U5.A17 | length 4422.1
  Top Layer (*.GTL) w10: TP11C.1@3085,8739 3085,8681.64 3135.5,8631.14 3135.5,8126 3171,8090.5 R18C.1@3171,7990 ; C21C.1@3100,7989 3101,7990 R18C.1@3171,7990 ; v1(3262,7814.08) 3260.92,7813 3260.92,7900.08 R18C.1@3171,7990
  Bottom Layer (*.GBL) w5: 3030.09,5227.99 2958.94,5156.85 2958.94,4762.01 3028,4692.95 U5.A17@3059.12,4692.95
  Bottom Layer (*.GBL) w10: 3030.09,5227.99 3084,5281.9 3084,6623.88 3315,6854.88 3315,7761.08 v1(3262,7814.08)
IMON_SLOT4: C21D.1 R18D.1 TP11D.1 U5.A15 | length 5818
  Top Layer (*.GTL) w5: v1(3019,5182.08) 3047.06,5210.14 ; 3047.06,5210.55 3070.86,5210.55 3078.83,5202.58 3091.56,5202.58 3111.06,5183.08 3149.46,5183.08 3159.46,5193.08 v1@4399,5193.08
  Top Layer (*.GTL) w10: C21D.1@4465,7996 R18D.1@4570,7996 ; TP11D.1@4485,8739 4485,8681.64 4535.5,8631.14 4535.5,8030.5 R18D.1@4570,7996 ; v1@4596.92,7813 v1(4597,7813.08) 4620,7836.08 4620,7946 R18D.1@4570,7996
  Bottom Layer (*.GBL) w5: v1@3018.56,5182.52 2978.63,5142.59 2978.63,4762.01 3028,4712.64 U5.A15@3059.12,4712.64
  Bottom Layer (*.GBL) w10: v1(4399,5194.08) 4399,5698.08 4409,5708.08 4409,6761.88 4688,7040.88 4688,7722.08 v1(4597,7813.08)
IMON_SLOT5: C21E.1 R18E.1 TP11E.1 U5.A13 | length 7171.3
  Top Layer (*.GTL) w5: v1(3064.03,5194.05) 3069.33,5188.75 3074.17,5193.58 3087.83,5193.58 3097.5,5183.91 3097.5,5173.31 3101.73,5169.08 3154.73,5169.08 3162.73,5177.08 5300.94,5177.08 5338.44,5214.58 5359.56,5214.58 5367.06,5207.08 5831,5207.08 v1(5843,5195.08) ; C21E.1@5890,7981 R18E.1@5975,7981
  Top Layer (*.GTL) w10: TP11E.1@5885,8739 5885,8681.64 5935.5,8631.14 5935.5,8034.5 5975,7995 5975,7986 6017.92,7943.08 6017.92,7813 v1(6019,7814.08)
  Bottom Layer (*.GBL) w5: U5.A13@3059.12,4732.32 3028,4732.32 2998.31,4762.01 2998.31,5128.33 v1(3064.03,5194.05)
  Bottom Layer (*.GBL) w10: v1(5843,5195.08) 5843,5281.08 5834,5290.08 5834,6776.08 6074,7016.08 6074,7721.08 6019,7776.08 v1(6019,7814.08)
IMON_SLOT6: C21F.1 R18F.1 TP11F.1 U5.A11 | length 8643.7
  Top Layer (*.GTL) w5: v1(3081,5177.08) 3100,5158.08 3156.46,5158.08 3166.46,5168.08 5304.67,5168.08 5342.17,5205.58 5355.83,5205.58 5389.33,5172.08 6666.67,5172.08 6681.17,5186.58 6694.83,5186.58 6709.33,5172.08 7156,5172.08 v1(7190,5206.08) v1@7191,5206.08 ; v1@7368.92,7813 v1(7369,7813.08)
  Top Layer (*.GTL) w10: TP11F.1@7285,8739 7285,8681.64 7335.5,8631.14 7335.5,8105.5 7390,8051 R18F.1@7390,7958 ; C21F.1@7318,7957 7319,7958 R18F.1@7390,7958 ; v1@7368.92,7813 7385.92,7796 7415,7796 7435,7816 7435,7913 R18F.1@7390,7958
  Bottom Layer (*.GBL) w5: U5.A11@3059.12,4752.01 3028,4752.01 3018,4762.01 3018,5114.08 v1(3081,5177.08) ; v1(7190,5206.08) 7191,5207.08 7191,6716.08 7510,7035.08 7510,7745.08 7442,7813.08 v1(7369,7813.08)
IMON_SLOT7: C21G.1 R18G.1 TP11G.1 U5.A9 | length 7818.3
  Top Layer (*.GTL) w5: v1(2612,4412.08) 2613,4412.08 2628,4427.08 3126.92,4427.08 v1(3143,4411)
  Top Layer (*.GTL) w10: TP11G.1@284.99,3487.82 284.99,3430.46 335.49,3379.96 335.49,2879.51 353,2862 353,2779 C21G.1@302,2728 305,2728 R18G.1@375,2658 402.56,2658 498.74,2561.82 v1(500,2563.08)
  Mid-Layer 1 (*.G1) w5: v1@501,1672.08 1060.54,1672.08 1135.54,1597.08 1242.27,1597.08 1327.07,1681.88 v1(2511.8,1681.88)
  Bottom Layer (*.GBL) w5: v1(2511.8,1681.88) 2511.8,1796.88 2514,1799.08 2514,3246.26 2584.77,3317.03 2584.77,3742.03 2603,3760.26 2603,4243.08 2560,4286.08 2560,4360.08 v1(2612,4412.08) ; U5.A9@3059.12,4771.69 3091,4771.69 3130,4732.69 3130,4424 v1(3143,4411)
  Bottom Layer (*.GBL) w10: v1(500,2563.08) 512,2551.08 512,1793.95 502,1783.95 502,1674.08 v1(501,1673.08)
IMON_SLOT8: C21H.1 R18H.1 TP11H.1 U5.A7 | length 6403.2
  Top Layer (*.GTL) w5: v1(2588,4450.08) v1@3154,4450.08
  Top Layer (*.GTL) w10: TP11H.1@1684.99,3487.82 1684.99,3430.46 1735.49,3379.96 1735.49,2880.51 1785,2831 R18H.1@1785,2716 ; C21H.1@1715,2716 R18H.1@1785,2716 ; v1(1894.74,2561.82) 1894.74,2606.26 R18H.1@1785,2716
  Mid-Layer 1 (*.G1) w5: v1@1912,1662.08 v1(2492,1662.08)
  Bottom Layer (*.GBL) w5: v1(2492,1662.08) 2494,1664.08 2494,1799.08 2494,3238.99 2575.77,3320.76 2575.77,3835.85 2590,3850.08 2590,4237.69 2547,4280.69 2547,4397.08 2588,4438.08 v1(2588,4450.08) ; U5.A7@3059.12,4791.38 3091,4791.38 3140,4742.38 3140,4462.76 3152.68,4450.08 v1@3154,4450.08
  Bottom Layer (*.GBL) w10: v1(1894.74,2561.82) 1918,2538.56 1918,1764.95 1912,1758.95 v1(1912,1663.08)
  other v1: 3149,4450.08
IMON_SLOT9: C21I.1 R18I.1 TP11I.1 U5.A29 | length 2654.3
  Top Layer (*.GTL) w5: TP11I.1@2695.5,2941.14 2904.44,3150.08 v1(3060,3150.08)
  Top Layer (*.GTL) w10: TP11I.1@2695.5,2941.14 2785.5,2851.14 3084.86,2851.14 3105,2831 3105,2766 C21I.1@3145,2726 R18I.1@3230,2726
  Bottom Layer (*.GBL) w5: U5.A29@3059.12,4574.84 3109.24,4574.84 3121,4563.08 3121,3831.91 3128.5,3824.41 3128.5,3801.24 3119,3791.74 3119,3490.49 3064.88,3436.37 3064.88,3399.08 3089.5,3374.46 3089.5,3162.58 3077,3150.08 v1(3060,3150.08)
IMON_SLOT10: C21J.1 R18J.1 TP11J.1 U5.A27 | length 8126.9
  Top Layer (*.GTL) w5: v1(2473.8,1372.88) 2508.6,1338.08 3959,1338.08 4036,1415.08 4285,1415.08 4405.54,1535.62 4561,1535.62 4653.82,1442.81 v1@4740,1442.81 ; v1(2534,4504.08) 2535,4505.08 2910,4505.08 v1(2947,4542.08) ; C21J.1@4509,2760 R18J.1@4583,2760 4621,2760 4714.74,2666.26 v1@4714.74,2561.82
  Top Layer (*.GTL) w10: TP11J.1@4085.5,2921.14 4155.5,2851.14 4435.5,2851.14 C21J.1@4503.32,2783.32 ; v1@4714.74,2561.82 v1(4716,2563.08)
  Bottom Layer (*.GBL) w5: v1(2473.8,1372.88) 2473.8,1522.88 2474,1523.08 2474,3236.31 2566.77,3329.08 2566.77,3839.85 2577,3850.08 2577,4232.31 2534,4275.31 v1(2534,4504.08) ; v1(2947,4542.08) 2947,4568.08 2973.45,4594.53 U5.A27@3059.12,4594.53
  Bottom Layer (*.GBL) w10: v1(4716,2563.08) 4741,2538.08 4741,1776.95 4740,1775.95 v1(4740,1443.08)
IMON_SLOT11: C21K.1 R18K.1 TP11K.1 U5.A25 | length 10516.3
  Top Layer (*.GTL) w5: v1(2454,1353.08) 2489,1318.08 3967.28,1318.08 4049.28,1400.08 5283,1400.08 5755,928.08 v1@6108,928.08 ; v1(2506,4523.08) 2507,4524.08 2887,4524.08 v1(2908,4545.08)
  Top Layer (*.GTL) w10: TP11K.1@5884.99,3487.82 5884.99,3430.46 5935.49,3379.96 5935.49,2801.49 C21K.1@5895,2761 R18K.1@5980,2761 6045,2761 6110.74,2695.26 6110.74,2561.82 v1(6111,2562.08)
  Bottom Layer (*.GBL) w5: v1(2454,1353.08) 2454,3234.69 2557.77,3338.47 2557.77,3843.85 2564,3850.08 2564,4226.92 2521,4269.92 2521,4423.08 2506,4438.08 v1(2506,4523.08) ; v1(2908,4545.08) 2908,4566.08 2956.13,4614.21 U5.A25@3059.12,4614.21
  Bottom Layer (*.GBL) w10: v1(6108,929.08) 6109,930.08 6109,1544.08 6111,1546.08 v1(6111,2562.08)
IMON_SLOT12: C21L.1 R18L.1 TP11L.1 U5.A23 | length 12006.2
  Top Layer (*.GTL) w5: v1(2434.2,1372.88) 2445.51,1372.88 2465.51,1392.88 2506.49,1392.88 2547.14,1352.22 3953.14,1352.22 4030.14,1429.22 4285,1429.22 4407.86,1552.08 4564.73,1552.08 4649,1467.81 5268.63,1467.81 5770.36,966.08 v1(7494,966.08) ; v1@2478,4545.08 2863,4545.08 v1(2865,4543.08) ; C21L.1@7285,2726 7290,2721 R18L.1@7375,2721
  Top Layer (*.GTL) w10: TP11L.1@7284.99,3487.82 7284.99,3430.46 7335.49,3379.96 7335.49,2760.51 R18L.1@7375,2721 7492.74,2603.26 7492.74,2561.82 v1(7494,2563.08)
  Bottom Layer (*.GBL) w5: v1(2434.2,1372.88) 2434.2,1522.88 2434,1523.08 2434,3233.08 2548.77,3347.85 2548.77,3847.85 2551,3850.08 2551,4221.54 2508,4264.54 2508,4417.69 2493,4432.69 2493,4436.08 2477,4452.08 v1(2477,4544.08) ; v1(2865,4543.08) 2865,4582.08 2916.82,4633.9 U5.A23@3059.12,4633.9
  Bottom Layer (*.GBL) w10: v1(7494,966.08) v1(7494,2563.08)
MANUAL_PWR_OFF: Q1A.1 Q1B.1 Q1C.1 Q1D.1 Q1E.1 Q1F.1 Q1G.1 Q1H.1 Q1I.1 Q1J.1 Q1K.1 Q1L.1 U1.3 | length 22190.3
  Top Layer (*.GTL) w5: Q1G.1@437.39,3280.08 439.39,3278.08 v1(483,3278.08) ; Q1A.1@437.4,8531.26 532.18,8531.26 v1(534,8533.08) ; v1(575,9384) 715,9384 735,9364 U1.3@735,9291.54 ; Q1H.1@1837.39,3280.08 1837.39,3417.47 v1(1838,3418.08) ; Q1B.1@1837.4,8531.26 1910.18,8531.26 v1(1911,8532.08) ; v1(3234,3344.08) 3237.39,3340.69 Q1I.1@3237.39,3280.08 ; Q1C.1@3237.4,8531.26 3305.82,8531.26 v1(3306,8531.08) ; Q1J.1@4637.39,3280.08 4637.39,3412.47 v1(4639,3414.08) ; Q1D.1@4637.4,8531.26 4703.18,8531.26 v1(4705,8533.08) ; v1(6037,3332.08) 6037.39,3331.69 Q1K.1@6037.39,3280.08 ; Q1E.1@6037.4,8531.26 6103.18,8531.26 v1(6104,8532.08) ; Q1L.1@7437.39,3280.08 7437.39,3351.47 v1(7440,3354.08) ; Q1F.1@7437.4,8531.26 7492.18,8531.26 v1(7493,8532.08)
  Mid-Layer 1 (*.G1) w5: v1(483,3278.08) 734,3278.08 784,3328.08 1697,3328.08 1788,3419.08 2134,3419.08 2209,3344.08 v1(3234,3344.08) 3266,3344.08 3346,3264.08 4452,3264.08 4600,3412.08 4928,3412.08 5004.76,3335.32 5971.82,3335.32 5973.06,3334.08 6130,3334.08 6203,3407.08 6379,3407.08 6432,3354.08 v1(7440,3354.08) ; v1@535,8532.08 v1(1911,8532.08) v1(6104,8532.08) v1(7493,8532.08)
  Bottom Layer (*.GBL) w5: 225,3644.08 225,3642.08 ; v1(483,3278.08) 483,3394.08 333,3544.08 291,3544.08 225,3610.08 225,3642.08 ; v1(575,9384) 507,9316 507,8855.08 534,8828.08 v1(534,8533.08) 443,8442.08 149,8442.08 35,8328.08 35,8155.08 172.36,8017.71 172.36,7676.44 198,7650.81 198,7150.08 165,7117.08 165,5594.81 283,5476.81 283,4719.08 211.5,4647.58 211.5,3655.58 225,3642.08
MANUAL_PWR_ON: Q2A.1 Q2B.1 Q2C.1 Q2D.1 Q2E.1 Q2F.1 Q2G.1 Q2H.1 Q2I.1 Q2J.1 Q2K.1 Q2L.1 R3.2 S2.2 | length 21747
  Top Layer (*.GTL) w5: Q2G.1@142.39,3480.08 188,3480.08 v1(189,3481.08) ; Q2A.1@142.4,8731.26 142.4,8799.48 v1(144,8801.08) ; v1(1542,3435.08) 1542.39,3435.47 Q2H.1@1542.39,3480.08 ; Q2B.1@1542.4,8731.26 1542.4,8801.48 v1(1544,8803.08) ; v1(2939,8801.08) 2942.4,8797.68 Q2C.1@2942.4,8731.26 ; v1(2942,3435.08) 2942.39,3435.47 Q2I.1@2942.39,3480.08 ; Q2D.1@4342.4,8731.26 4342.4,8799.48 v1(4344,8801.08) ; v1(4572,3566.08) 4572.9,3565.18 Q2J.1@4572.9,3517.4 ; v1(5741,3547.08) 5742.39,3545.69 Q2K.1@5742.39,3480.08 ; Q2E.1@5742.4,8731.26 5742.4,8798.48 v1(5745,8801.08) ; Q2L.1@7142.39,3480.08 7143,3480.69 v1(7143,3553.08) ; Q2F.1@7142.4,8731.26 7183.18,8731.26 7200,8748.08 v1(7200,8801.08)
  Mid-Layer 1 (*.G1) w5: v1@142.4,8801.08 v1(144,8801.08) v1(2939,8801.08) v1(4344,8801.08) v1(5745,8801.08) v1(7200,8801.08) ; v1(189,3481.08) 235,3435.08 v1(1542,3435.08) v1(2942,3435.08) 3038,3435.08 3063,3460.08 4063,3460.08 4167,3564.08 4596,3564.08 4717,3443.08 5515,3443.08 5619,3547.08 v1(5741,3547.08) 5743,3547.08 5873,3417.08 6128,3417.08 6167,3456.08 6898,3456.08 6995,3553.08 v1(7143,3553.08)
  Bottom Layer (*.GBL) w5: v1@140,8797.08 140,8445.81 26,8331.81 26,8151.35 163.36,8013.99 163.36,7672.71 166,7670.08 189,7647.08 189,7153.81 156,7120.81 156,5591.08 274,5473.08 274,4722.81 202.5,4651.31 202.5,3655.58 189,3642.08 v1(189,3481.08) ; v1(144,8801.08) 144,8993.08 543,9392.08 R3.2@543,9653.08
  Bottom Layer (*.GBL) w10: R3.2@543,9653.08 544.08,9652 S2.2@656,9652
NetC1_2: C1.2 R2.1 S1.2 U1.2 | length 527.1
  Top Layer (*.GTL) w5: v1(679,8993) 679,9285.54 U1.2@685,9291.54
  Bottom Layer (*.GBL) w5: C1.2@567,8964.08 567,9039.08 667.08,9039.08 679,9027.16 v1(679,8993)
NetC5_1: C5.1 R12.2 U1.6 U1.7 | length 226
  Top Layer (*.GTL) w5: U1.6@735,9484.46 U1.7@685,9484.46 C5.1@685,9595 686,9594 R12.2@750,9594
NetC11_1: C11.1 D1.2 L2.1 U21.8
NetC11_2: C11.2 U21.6 | length 79.7
  Bottom Layer (*.GBL) w10: C11.2@4603.8,794.34 4638.8,794.34 4650.22,805.76 U21.6@4650.22,834.34
NetC14_2: C14.2 R33.1 | length 93.8
  Top Layer (*.GTL) w10: C14.2@4801.8,699.34 4803.8,697.34 v2(4803.8,650.34)
  Bottom Layer (*.GBL) w10: v2(4803.8,650.34) R33.1@4803.8,694.34
NetC17_1: C17.1 U22.2 | length 111.8
  Bottom Layer (*.GBL) w30: U22.2@2550,718.14 2550,634.6 C17.1@2570,614.6
NetC17_2: C17.2 U22.4 | length 107.7
  Bottom Layer (*.GBL) w30: U22.4@2450,718.14 2450,624.6 C17.2@2460,614.6
NetD1_1: D1.1 U21.7
NetJ1A_13: J1A.13 J1A.14 K1A.14 TP10A.1 | length 3268.5
  Top Layer (*.GTL) w10: TP10A.1@301,6712 301,7116.75 ; TP10A.1@301,6712 301,7116.75 ; TP10A.1@301,6712 301,7116.75 ; TP10A.1@301,6712 301,7116.75 ; TP10A.1@301,6712 301,7116.75 ; TP10A.1@301,6712 301,7116.75 ; 301,7116.75 K1A.14@400,7215.75 ; 301,7116.75 K1A.14@400,7215.75 ; 301,7116.75 K1A.14@400,7215.75 ; 301,7116.75 K1A.14@400,7215.75 ; 301,7116.75 K1A.14@400,7215.75 ; 301,7116.75 K1A.14@400,7215.75
NetJ1B_13: J1B.13 J1B.14 K1B.14 TP10B.1 | length 3268.5
  Top Layer (*.GTL) w10: TP10B.1@1701,6712 1701,7116.75 ; TP10B.1@1701,6712 1701,7116.75 ; TP10B.1@1701,6712 1701,7116.75 ; TP10B.1@1701,6712 1701,7116.75 ; TP10B.1@1701,6712 1701,7116.75 ; TP10B.1@1701,6712 1701,7116.75 ; 1701,7116.75 K1B.14@1800,7215.75 ; 1701,7116.75 K1B.14@1800,7215.75 ; 1701,7116.75 K1B.14@1800,7215.75 ; 1701,7116.75 K1B.14@1800,7215.75 ; 1701,7116.75 K1B.14@1800,7215.75 ; 1701,7116.75 K1B.14@1800,7215.75
NetJ1C_13: J1C.13 J1C.14 K1C.14 TP10C.1 | length 615.8
  Top Layer (*.GTL) w10: TP10C.1@2664,7157 2731,7090 3074.25,7090 K1C.14@3200,7215.75
NetJ1D_13: J1D.13 J1D.14 K1D.14 TP10D.1 | length 3268.5
  Top Layer (*.GTL) w10: TP10D.1@4501,6712 4501,7116.75 ; TP10D.1@4501,6712 4501,7116.75 ; TP10D.1@4501,6712 4501,7116.75 ; TP10D.1@4501,6712 4501,7116.75 ; TP10D.1@4501,6712 4501,7116.75 ; TP10D.1@4501,6712 4501,7116.75 ; 4501,7116.75 K1D.14@4600,7215.75 ; 4501,7116.75 K1D.14@4600,7215.75 ; 4501,7116.75 K1D.14@4600,7215.75 ; 4501,7116.75 K1D.14@4600,7215.75 ; 4501,7116.75 K1D.14@4600,7215.75 ; 4501,7116.75 K1D.14@4600,7215.75
NetJ1E_13: J1E.13 J1E.14 K1E.14 TP10E.1 | length 3268.5
  Top Layer (*.GTL) w10: TP10E.1@5901,6712 5901,7116.75 ; TP10E.1@5901,6712 5901,7116.75 ; TP10E.1@5901,6712 5901,7116.75 ; TP10E.1@5901,6712 5901,7116.75 ; TP10E.1@5901,6712 5901,7116.75 ; TP10E.1@5901,6712 5901,7116.75 ; 5901,7116.75 K1E.14@6000,7215.75 ; 5901,7116.75 K1E.14@6000,7215.75 ; 5901,7116.75 K1E.14@6000,7215.75 ; 5901,7116.75 K1E.14@6000,7215.75 ; 5901,7116.75 K1E.14@6000,7215.75 ; 5901,7116.75 K1E.14@6000,7215.75
NetJ1F_13: J1F.13 J1F.14 K1F.14 TP10F.1 | length 3268.5
  Top Layer (*.GTL) w10: TP10F.1@7301,6712 7301,7116.75 ; TP10F.1@7301,6712 7301,7116.75 ; TP10F.1@7301,6712 7301,7116.75 ; TP10F.1@7301,6712 7301,7116.75 ; TP10F.1@7301,6712 7301,7116.75 ; TP10F.1@7301,6712 7301,7116.75 ; 7301,7116.75 K1F.14@7400,7215.75 ; 7301,7116.75 K1F.14@7400,7215.75 ; 7301,7116.75 K1F.14@7400,7215.75 ; 7301,7116.75 K1F.14@7400,7215.75 ; 7301,7116.75 K1F.14@7400,7215.75 ; 7301,7116.75 K1F.14@7400,7215.75
NetJ1G_13: J1G.13 J1G.14 K1G.14 TP10G.1 | length 544.8
  Bottom Layer (*.GBL) w12: TP10G.1@300.99,1460.82 300.99,1865.57 K1G.14@399.99,1964.57
NetJ1H_13: J1H.13 J1H.14 K1H.14 TP10H.1 | length 544.8
  Bottom Layer (*.GBL) w12: TP10H.1@1700.99,1460.82 1700.99,1865.57 K1H.14@1799.99,1964.57
NetJ1I_13: J1I.13 J1I.14 K1I.14 TP10I.1 | length 544.8
  Bottom Layer (*.GBL) w5: TP10I.1@3100.99,1460.82 3100.99,1865.57 K1I.14@3199.99,1964.57
NetJ1J_13: J1J.13 J1J.14 K1J.14 TP10J.1 | length 544.8
  Mid-Layer 1 (*.G1) w10: TP10J.1@4500.99,1460.82 4500.99,1865.57 K1J.14@4599.99,1964.57
NetJ1K_13: J1K.13 J1K.14 K1K.14 TP10K.1 | length 544.8
  Mid-Layer 1 (*.G1) w10: TP10K.1@5900.99,1460.82 5900.99,1865.57 K1K.14@5999.99,1964.57